# Altium PCB Hameg.PcbDoc
Units mil, origin at the board's own origin, x right, y up, seen from the top; angles counter-clockwise.
Board outline 3446.85 x 7668.31 mil, 2 copper layers (Top Layer, Bottom Layer); 126 components, 67 nets, 330 pads, 60 vias.
Unrouted connection lines stored in the file: 1.
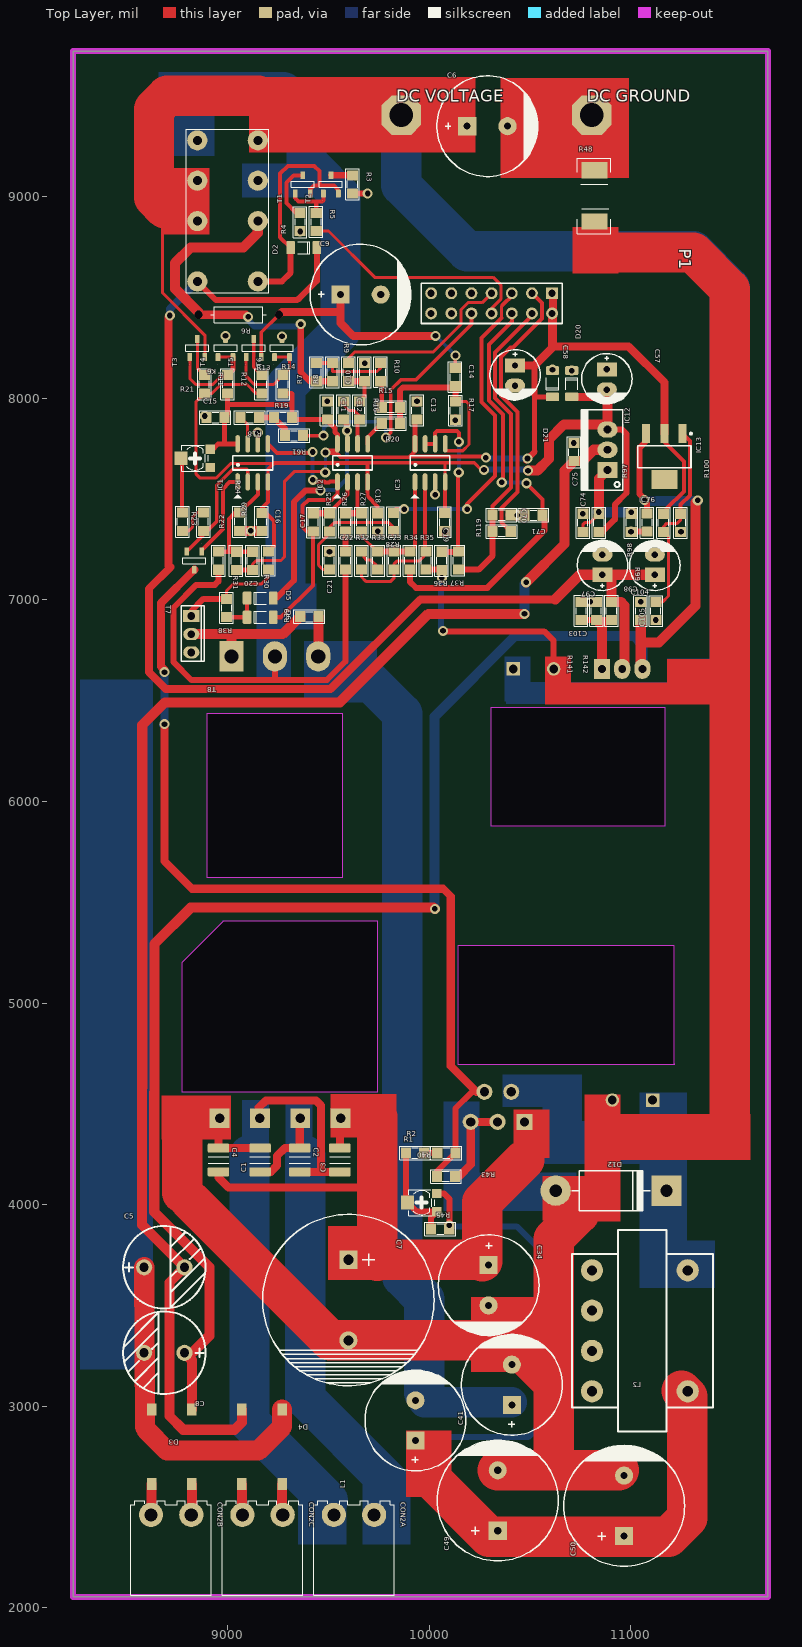
[diagram p0: Top Layer view]
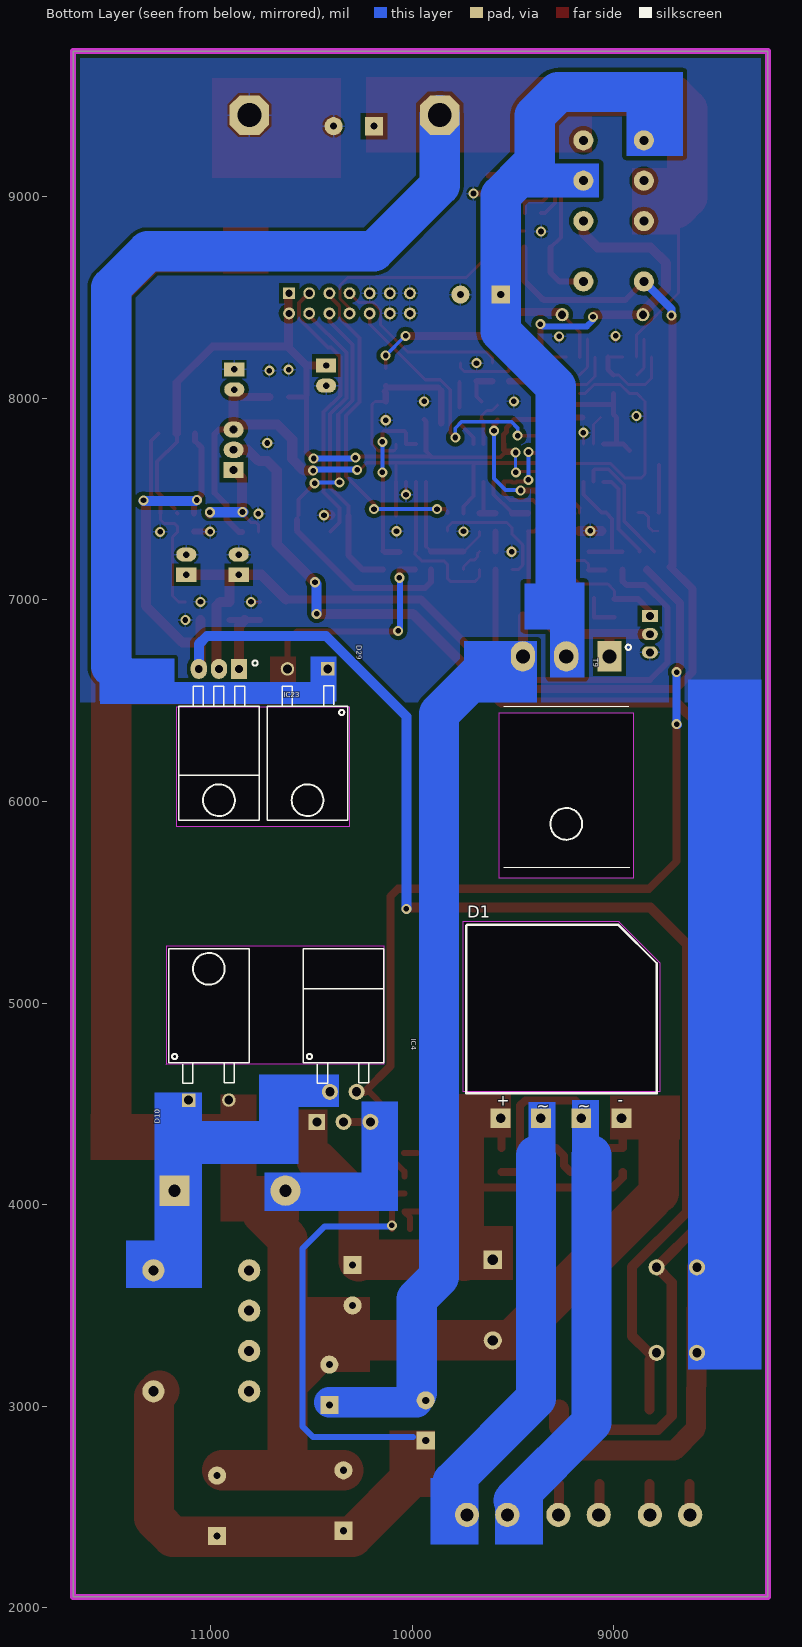
[diagram p1: Bottom Layer view, seen from below]

## Layer stack, top to bottom
Top Layer: signal copper 1.4
Dielectric: dielectric 12.6, FR-4, Dk 4.8
Bottom Layer: signal copper 1.4

## Board outline
8234.25,2054.13 11681.1,2054.13 11681.1,9722.44 8234.25,9722.44
cut-out: 10308.07,6466.54 11170.28,6466.54 11170.28,5877.95 10308.07,5877.95
cut-out: 10141.24,4695.87 11219,4695.87 11216.04,4698.82 11216.04,5284.45 10141.24,5284.45
cut-out: 8899.11,6437.99 8916.83,6437.01 9569.39,6437.01 9569.39,5621.06 8899.9,5621.06
cut-out: 8771.65,4559.06 9746.06,4559.06 9746.06,5406.5 8975.39,5406.5 8975.39,5403.54 8771.65,5199.8

## Design rules (kind name [scope] priority, off if disabled: settings)
Clearance Impoly [All vs (Inpoly)] p1: gap=20
Clearance [All] p2: gap=10
ComponentClearance [All] p1 off: gap=10 collisioncheckmode=3 verticalgap=10 showdistances=FALSE
PolygonConnect [All] p1: connectstyle=Relief reliefconductorwidth=10 reliefentries=4 polygonreliefangle="90 Angle" airgapwidth=10
RoomDefinition U_Preregulation [InComponentClass('U_Preregulation')] p1 off: confinementstyle=ConfineIn formatcopy=TRUE lockcomponents=FALSE outline 8475,1990 11480,1990 11480,9470 8475,9470
RoomDefinition U_Endregulation [InComponentClass('U_Endregulation')] p2 off: confinementstyle=ConfineIn formatcopy=TRUE lockcomponents=FALSE outline 8475,2005.43 11495,2005.43 11495,9475 8475,9475
RoutingVias [All] p1: holewidth=28 width=50 viastyle="Through Hole" minholewidth=28 minwidth=50 maxholewidth=28 maxwidth=50
SilkToSolderMaskClearance SilkscreenOverComponentPads [IsPad] p1: minsilkscreentomaskgap=10 clearancetoexposedcopper=TRUE
SolderMaskExpansion [All] p1: expansion=4
Width [All] p1: maxlimit=500 minlimit=10 preferedwidth=100
26 further rules are at their usual default settings.

## Classes and differential pairs
component class U_Preregulation: C1 C1_U_Preregulation2 C2 C2_U_Preregulation2 C3 C3_U_Preregulation2 C4 C4_U_Preregulation2 C5_U_Preregulation2 C7 C7_U_Preregulation2 C8 C8_U_Preregulation2 C20 C20_U_Preregulation2 C34 C34_U_Preregulation2 C41 C41_U_Preregulation2 C49 C49_U_Preregulation2 C50 C50_U_Preregulation2 C57 C57_U_Preregulation2 C58 C58_U_Preregulation2 C74 C74_U_Preregulation2 C75 C75_U_Preregulation2 C76 C76_U_Preregulation2 C97 C97_U_Preregulation2 C98 C98_U_Preregulation2 C103 C103_U_Preregulation2 C104 C104_U_Preregulation2 C105 C105_U_Preregulation2 CON2A CON2A_U_Preregulation2 CON2B CON2B_U_Preregulation2 CON2C CON2C_U_Preregulation2 D1 D3 D3_U_Preregulation2 D4 D4_U_Preregulation2 D10 D12 D20 D21 IC1 IC4 IC12 IC13 IC23 L1 L1_U_Preregulation2 L2 L2_U_Preregulation2 R1 R2 R2_U_Preregulation2 R21 R21_U_Preregulation2 R22 R23 R24 R29 R31 R40 R43 R45 R97 R98 R99 R100 R141 R142 T7
component class U_Endregulation: C6 C9 C10 C11 C12 C13 C14 C15 C16 C17 C18 C19 C21 C22 C23 C70 C71 D2 D5 D6 D29 "DC GROUND" "DC VOLTAGE" IC2 IC3 K6 P1 R3 R4 R5 R6 R7 R8 R9 R10 R11 R12 R13 R14 R15 R16 R17 R18 R19 R20 R25 R26 R27 R28 R30 R32 R33 R34 R35 R36 R37 R38 R39 R48 R61 R119 T1 T2 T3 T4 T5 T6 T8 T9

## Components (designator, comment, footprint, x,y, rotation, side; value= is the part's Value field where it differs from the comment)
C1 "1n/250V" CAPC3225X220N 9161.42,4221.46 r90 top
C2 "1n/250V" CAPC3225X220N 9358.27,4221.46 r270 top
C3 "1n/250V" CAPC3225X220N 9557.09,4221.46 r90 top
C4 "1n/250V" CAPC3225X220N 8954.72,4221.46 r270 top
C5 "330uF/16V" CAP40x20 8586.42,3688.98 r0 top
C6 "100uF/63V" CP2/5 10188.98,9350.39 r0 top
C7 "2200uF/63V" CP4/8.5 9599.41,3726.38 r270 top
C8 "1000uF/16V" CAP40x20 8786.42,3264.76 r180 top
C9 "100uF/63V" CP2/5 9560,8515 r0 top
C10 "4u7" SM-0805 9680,8130 r90 top
C11 "100n" SM-0805 9495,7940 r270 top
C12 "100p" SM-0805 9575,7940 r270 top
C13 "100n" SM-0805 9940,7940 r270 top
C14 "1n" SM-0805 10129.92,8105.31 r270 top
C15 "100n" SM-0805 8940,7905 r0 top
C16 "100n" SM-0805 9170,7386.8 r270 top
C17 "1n" SM-0805 9425,7385 r90 top
C18 "100n" SM-0805 9745,7385 r270 top
C19 "100n" SM-0805 10077.76,7385.83 r270 top
C20 "100n" SM-0805 9123.54,7194.02 r270 top
C21 "4u7" SM-0805 9505,7195 r90 top
C22 "100n" SM-0805 9585,7195 r90 top
C23 "100p" SM-0805 9825,7195 r90 top
C34 "100uF/63V" CP2/5 10295.28,3699.8 r270 top
C41 "100uF/63V" CP2/5 10410.43,3005.91 r90 top
C49 "470uF/63V" CP3/7 10340.55,2381.89 r90 top
C50 "470uF/63V" CP3/7 10967.52,2355.32 r90 top
C57 "100uF/10V" CP1/2.5 10881.89,8143.7 r270 top
C58 "100uF/10V" CP1/2.5 10426.18,8163.17 r270 top
C70 "4u7" SM-0805 10360,7421.28 r0 top
C71 "4u7" SM-0805 10517.72,7420.28 r180 top
C74 "100n" SM-0805 10762.99,7382.72 r90 top
C75 "100n" SM-0805 10718.5,7733.27 r90 top
C76 "100n" SM-0805 11081.69,7383.86 r90 top
C97 "100uF/10V" CP1/2.5 10860,7125 r90 top
C98 "100uF/10V" CP1/2.5 11120,7125 r90 top
C103 "100n" SM-0805 10755,6945.43 r270 top
C104 "100n" SM-0805 11050,6945.43 r270 top
C105 "100n" SM-0805 11125,6945.43 r90 top
CON2A "SUPPLY" JACK2_NAM 9727.36,2460.63 r270 top
CON2B "SUPPLY" JACK2_NAM 8820.04,2460.63 r270 top
CON2C "SUPPLY" JACK2_NAM 9273.7,2460.63 r270 top
D1 "Bridge2" "DIODE BRIDGE(FLAT) BIG" 9260.83,4402.56 r180 bottom
D2 "1N4150" "SOD80, LL-34" 9377.99,8747.72 r180 top
D3 "Bridge 1A SMD" SDIP 8822.83,2983.27 r270 top
D4 "Bridge 1A SMD" SDIP 9270.67,2983.27 r270 top
D5 "1N4150" "SOD80, LL-34" 9161.97,7009.09 r0 top
D6 "1N4150" "SOD80, LL-34" 9161.97,6914.09 r0 top
D10 "NP" TO-220AC 11008.86,4518.68 r0 bottom
D12 "SB5100" D5A 11178.15,4068.9 r180 top
D20 "1N4150" "SOD80, LL-34" 10612.2,8072.83 r90 top
D21 "1N4150" "SOD80, LL-34" 10707.68,8072.83 r270 top
D29 "MBR20100" TO-220AC 10517.99,6657.72 r180 bottom
"DC GROUND" "Testpoint" TP 10807.09,9405.51 r90 top
"DC VOLTAGE" "Testpoint" TP 9862.2,9405.51 r90 top
IC1 "LM358AM" SO-8 9125,7680 r90 top
IC2 "LTC6081" SO-8 9620,7680 r90 top
IC3 "LTC6081" SO-8 10005,7680 r90 top
IC4 "LM2576HVT - ADJ" LM2576 10340.55,4577.76 r180 bottom
IC12 "LM337" QTO-220 10885,7645 r90 top
IC13 "LM317" MP04A_N 11167.32,7710.63 r270 top
IC23 "LM317" QTO-220N 10857.99,6657.72 r180 bottom
K6 "Relay-DPDT" Relay5V 8850,8880 r180 top
L1 "270uH/2A" CP2/5 9932.09,2828.74 r90 top
L2 "270uH/2A" TRANS6C 10808.07,3073.82 r0 top
P1 "Header 7X2" HDR2X7 10610.24,8521.65 r0 top
R1 "49K9" SM-0805 9930.24,4256.02 r0 top
R2 "1K" "POT SMD 3MM" 9963.27,4009.61 r90 top
R3 "0R00" SM-0805 9620,9061.65 r270 top
R4 "NP" SM-0805 9360,8875 r90 top
R5 "1K00" SM-0805 9440,8875 r270 top
R6 "1R00" RESTH_AXIAL-0.4 9055,8415 r180 top
R7 "4K99" SM-0805 9440,8130 r90 top
R8 "NP" SM-0805 9520,8130 r90 top
R9 "10K0" SM-0805 9600,8130 r270 top
R10 "4K99" SM-0805 9760,8130 r270 top
R11 "2K00" SM-0805 8885,8070 r270 top
R12 "2K00" SM-0805 9000,8070 r270 top
R13 "2K00" SM-0805 9170,8070 r270 top
R14 "2K00" SM-0805 9275,8070 r270 top
R15 "4K99" SM-0805 9810,7955 r0 top
R16 "10K0" SM-0805 9655,7940 r270 top
R17 "2K00" SM-0805 10130.51,7939.02 r270 top
R18 "10K0" SM-0805 9110,7905 r180 top
R19 "10K0" SM-0805 9275,7905 r0 top
R20 "10K0" SM-0805 9810,7875 r180 top
R21 "100R" "POT SMD 3MM" 8838.58,7702.76 r90 top
R22 "2K20" SM-0805 8880,7387.8 r90 top
R23 "1K5" SM-0805 8776.57,7387.8 r90 top
R24 "4K42" SM-0805 9060,7387.8 r90 top
R25 "10K0" SM-0805 9505,7385 r90 top
R26 "10K0" SM-0805 9585,7385 r90 top
R27 "10K0" SM-0805 9665,7385 r90 top
R28 "10K0" SM-0805 9823.82,7385.83 r270 top
R29 "39K2" SM-0805 8954.72,7194.88 r90 top
R30 "1K00" SM-0805 9202.76,7194.88 r270 top
R31 "10K0" SM-0805 9043.54,7194.02 r270 top
R32 "976R" SM-0805 9665,7195 r90 top
R33 "0R00" SM-0805 9745,7195 r90 top
R34 "10K0" SM-0805 9905,7195 r90 top
R35 "20R0" SM-0805 9985,7195 r90 top
R36 "2k94" SM-0805 10062.99,7193.9 r270 top
R37 "1k00" SM-0805 10145,7195 r270 top
R38 "499R" SM-0805 8995,6960 r270 top
R39 "4K99" SM-0805 9405.51,6917.32 r180 top
R40 "0" SM-0805 10085.24,4256.02 r0 top
R43 "1K00" SM-0805 10083.27,4139.61 r180 top
R45 "NP" SM-0805 10055.12,3878.94 r180 top
R48 "0R05" 2512 10820.87,8876.97 r90 top
R61 "10K0" SM-0805 9329.72,7814.96 r180 top
R97 "249R" SM-0805 10842.99,7382.72 r90 top
R98 "665R" SM-0805 11002.99,7382.72 r270 top
R99 "249R" SM-0805 11162.99,7382.72 r270 top
R100 "1K00" SM-0805 11247.99,7382.72 r90 top
R119 "1M00" SM-0805 10360,7340 r180 top
R141 "665R" SM-0805 10830,6945.43 r270 top
R142 "249R" SM-0805 10905,6945.43 r270 top
T1 "NP" SOT23-3 9372.91,9061.65 r90 top
T2 "BC817" SOT23-3 9512.91,9061.65 r90 top
T3 "BC846B" SOT23-3 8850,8250 r90 top
T4 "BC846B" SOT23-3 8990,8250 r90 top
T5 "BC846B" SOT23-3 9130,8250 r90 top
T6 "BC846B" SOT23-3 9270,8250 r90 top
T7 "BC856B" SOT23-3 8835,7195 r270 top
T8 "BD237" TO-126 8820,6920 r270 top
T9 "TIP147" TO-247 9235,6720 r0 bottom

## Footprints (in the part's own frame and the unit in brackets; to place one, negate y for a bottom-side part, rotate by r counter-clockwise, add the part's x,y. Pads: shape width x height; smd on the part's side, far side on the other; paste and mask are expansions set on the pad)
2512 [mil]
  rect 80x130 smd: 1(0,0) 2(255,0)
  silkscreen extent -60,-80 315,85
CAP40x20 [mil]
  round 80 hole 45: 1(0,0) 2(200,0)
  silkscreen extent -105,-205 305,205, body extent -97,-197 296,197, height 788
CAPC3225X220N [mm] "Chip Capacitor, Body 3.2x2.5mm, EIA 1210, IPC Medium Density"
  round 0.508 on Mech15: 0(0,0)
  rrect25% 1.15x2.7 smd: 1(-1.5,0) 2(1.5,0)
  silkscreen extent -0.4,-1.3 0.4,1.3, body extent -1.8,-1.4 1.8,1.4, height 2.19
CP1/2.5 [mil] "Tu hoa 33 >100 uF,50V, 220uF/16V,25V"
  rect 70x100 hole 32: 1(0,0)
  oval 70x100 hole 32: 2(100,0)
  silkscreen extent -78,-125 172,125, body extent -76,-124 172,124, height 422
CP2/5 [mil] "Tu hoa 1000uF/25V,50V"
  rect 90x90 hole 35: 1(0,0)
  round 90 hole 35: 2(200,0)
  silkscreen extent -150,-250 350,250, body extent -145,-244 347,248, height 740
CP3/7 [mil] "Tu hoa 4700uF/25V"
  rect 90x90 hole 35: 1(0,0)
  round 90 hole 35: 2(300,0)
  silkscreen extent -150,-300 450,300
CP4/8.5 [mil] "Tu hoa 4700uF/50V"
  rect 90x90 hole 50: 1(0,0)
  round 90 hole 50: 2(400,0)
  silkscreen extent -225,-425 625,425, body extent -236,-438 630,428, height 984
D5A [mil] "Diode 5A, W 200mil, L 550mil"
  round 150 hole 60: 1(550,0)
  rect 150x150 hole 60: 2(0,0)
  silkscreen extent 80,-100 470,100, body extent -52,-106 590,103, height 254
"DIODE BRIDGE(FLAT) BIG" [mil]
  rect 98.43x98.43 hole 47.24: 1(-300,26) 2(-100,26) 3(100,26) 4(300,26)
  silkscreen extent -470,150 475,985, body extent -463,150 463,989, height 224
HDR2X7 [mm] "Connector; Header; 7x2 Position"
  rect 1.5x1.5 hole 0.9: 1(0,0)
  round 1.5 hole 0.9: 2(0,-2.54) 3(-2.54,0) 4(-2.54,-2.54) 5(-5.08,0) 6(-5.08,-2.54) 7(-7.62,0) 8(-7.62,-2.54) 9(-10.16,0) 10(-10.16,-2.54) 11(-12.7,0) 12(-12.7,-2.54) 13(-15.24,0) 14(-15.24,-2.54)
  silkscreen extent -16.51,-3.81 1.27,1.27, body extent -16.5,-3.82 1.26,1.28, height 8.52
JACK2_NAM [mil]
  round 120 hole 65: 1(0,0) 2(0,-200)
  silkscreen extent -70,-300 400,100, body extent -73,-300 400,100, height 339
LM2576 [mil]
  rect 80x80 hole 45: 1(-132,-167.09)
  round 80 hole 45: 2(-67,-18) 3(1,-167) 4(66,-18) 5(134,-167)
  silkscreen extent -199,24 200,691, body extent -204,-183 205,692, height 185
MP04A_N [mm] "SOT223, 4-Leads, Body 6.5x3.5mm, Pitch 2.3mm, Lead Span 7mm, IPC Medium Density"
  rect 2.4x1 smd: 1(-2.9,2.3) 2(-2.9,0) 3(-2.9,-2.3)
  rect 2.4x3.3 smd: 4(2.9,0)
  silkscreen extent -3.02,-3.35 1.4,3.48, body extent -1.85,-3.35 1.85,3.35, height 1.8
"POT SMD 3MM" [mil]
  rect 45x47 smd: 1(-45,-75) 3(45,-75)
  rect 69x63 smd: 2(0,70)
  silkscreen extent -65,-65 65,65, body extent -75,-88 75,89, height 40
QTO-220 [mil] "TO-220 - 1-2-3"
  rect 80x100 hole 39: 1(0,0)
  oval 80x100 hole 39: 2(100,0) 3(200,0)
  silkscreen extent -100,-76 300,130, body extent -119,-64 322,121, height 755
QTO-220N [mil] "TO-220 - 1-2-3"
  rect 80x100 hole 39: 1(0,0)
  oval 80x100 hole 39: 2(-100,0) 3(-200,0)
  silkscreen extent -300,-750 99,42, body extent -300,-752 100,7, height 180
Relay5V [mil]
  round 100 hole 45: 1(0,0) 2(0,-200) 3(0,-400) 4(-300,0) 5(-300,-200) 6(-300,-400) 7(0,300) 8(-300,300)
  silkscreen extent -355,-455 55,355, body extent -343,-459 43,359, height 484
RESTH_AXIAL-0.4 [mil]
  round 0 / inner round 0 / far side round 65 hole 40 unplated: 1(-200,0) 2(200,0)
  silkscreen extent -138,-40 138,40, body extent -212,-50 212,50, height 102
SDIP [mm] "SDIP diode"
  rect 1.52x1.2 smd: 1(0,0) 2(9.398,0) 3(9.398,-5.08) 4(0,-5.08)
  body extent -0.38,-6.79 9.62,1.71, height 3.63
SM-0805 [mil] "Compoment SMD 80x50mil"
  rect 50x55 smd: 1(-45,0) 2(45,0)
  silkscreen extent -77,-34 76,33, body extent -40,-27 40,23, height 24
SO-8 [mm] "8-Pin Small Outline Integrated Circuit 1.27 mm Pitch, IPC Medium Density"
  oval 2.2x0.6 smd: 1(-2.4,1.905) 2(-2.4,0.635) 3(-2.4,-0.635) 4(-2.4,-1.905) 5(2.4,-1.905) 6(2.4,-0.635) 7(2.4,0.635) 8(2.4,1.905)
  silkscreen extent -4.44,-2.5 0.9,2.5, body extent -2.89,-2.43 3.15,2.59, height 1.6
"SOD80, LL-34" [mm] "Diode, MiniMELF"
  round 0.5 on Mech15: 0(0,0)
  rrect25% 1.1x1.65 smd: A(1.65,0) K(-1.65,0)
  silkscreen extent -0.76,-0.76 0.76,0.76, body extent -1.8,-0.75 1.8,0.75, height 1.47
SOT23-3 [mm] "SOT23, 3 pin"
  round 0.5 on Mech15: 0(0,0)
  rrect25% 1x0.6 smd: 1(-1.15,0.95) 2(-1.15,-0.95) 3(1.15,0)
  silkscreen extent -0.38,-1.45 0.38,1.45, body extent -1.4,-1.45 1.4,1.45, height 1.29
TO-126 [mil] "TO-126 - 1-2-3"
  rect 60x80 hole 39: 1(0,0)
  oval 60x80 hole 39: 2(90,0) 3(180,0)
  silkscreen extent -50,-50 225,65
TO-220AC [mm] "TO, Thru-Hole, Vertical, Heatsink Mounted; 3 In-Line Leads (1 Absent); Pitch 2.54 mm"
  rect 1.7x1.7 hole 1.1: 1(2.54,0)
  round 1.7 hole 1.1: 3(-2.54,0)
  silkscreen extent -5.08,-19.05 5.05,-2.11, body extent -5.08,-19.09 5.08,0.19, height 4.45
TO-247 [mil] "TO-247 - 1-2-3"
  rect 120x150 hole 70: 1(-215,0)
  oval 120x150 hole 70: 2(0,0) 3(215,0)
  silkscreen extent -321,-58 310,1050, body extent -313,-15 313,1047, height 232
TP [mm] "VIT"
  oct 5x5 hole 3: 1(0,0)
TRANS6C [mil]
  round 110 hole 50: 1(0,0) 1(0,200) 3(0,400) 3(0,600) 5(475,600) 6(475,0)
  silkscreen extent -100,-200 600,800, body extent -100,-200 600,800, height 787

## Part data
C1 C2 C3 C4 C10 C11 C12 C13 C14 C15 C16 C17 C18 C19 C20 C21 C22 C23 C70 C71 C74 C75 C76 C103 C104 C105: library part CAP, "Capacitor"
C5 C6 C7 C8 C9 C34 C41 C49 C50 C57 C58 C97 C98: library part "CAPACITOR POL", "Capacitor"
CON2A CON2B CON2C: library part CON2, "Connector"
D1: "Diode Bridge"
D2 D5 D6 D20 D21: library part "Diode 1N4007", "1 Amp General Purpose Rectifier"
D3 D4: library part "Diode Bridge Flate", "Diode Bridge"
D10 D12 D29: library part "D Schottky", "Schottky Diode"
IC1: "Low Power Dual Operational Amplifier, 8-pin Narrow SOIC"
IC2 IC3: library part LM358AM, "Low Power Dual Operational Amplifier, 8-pin Narrow SOIC"
IC4: library part LM2576, "LM2576 - ADJ"
IC12: "On ap (-)     -1.2 -> - 37V"
IC13 IC23: "Adj Voltage +1.2 -> +37V"
K6: "Dual-Pole Dual-Throw Relay"
L1 L2: library part INDUCTOR
P1: "Header, 7-Pin, Dual row"
R1 R3 R4 R5 R6 R7 R8 R9 R10 R11 R12 R13 R14 R15 R16 R17 R18 R19 R20 R22 R23 R24 R25 R26 R27 R28 R29 R30 R31 R32 R33 R34 R35 R36 R37 R38 R39 R40 R43 R61 R97 R98 R99 R100 R119 R141 R142: library part RES2, "tme.vn"
R2 R21: library part RPot, "Potentiometer"
R45: library part RES2
R48: library part "Res Semi", "Semiconductor Resistor"
T1 T2 T3 T4 T5 T6 T8: library part TIP41C, "NPN 2W, BCE BD139"
T7: library part PNP1, "Công ty C? ph?n TQCOM"
T9: library part TIP42C, "PNP 2W, BCE Hoang Phat"

## Via types
v1: diameter 50, hole 28, Top Layer to Bottom Layer, 60 vias

## Nets (pads, with @x,y where several pads share a name; then routed paths per layer and width w, separated by ;. In a path a pad name is that pad's centre, name@x,y a point inside that pad or via, vN(x,y) a via of type N, cw(c..) or ccw(c..) an arc to the next point about the centre after c; other vN are vias at no path point)
4,6V: C97.1 C98.1 D2.K IC23.2 K6.7 R142.1 | length 6190.6
  Top Layer w25: C97.1@10897.64,7125 C97.1@10905,7117.64
  Top Layer w30: K6.7 8941.81,8488.19 9344.83,8488.19 9350.45,8493.82 9354.06,8493.82 9442.95,8582.71 D2.K
  Top Layer w40: v1(8713.58,8411.42) 8707.08,8404.92 8707.08,7171.85 8716.54,7162.4 8609.25,7055.12 8609.25,6641.71 8693.36,6557.6 9511,6557.6 9956.36,7002.95 10625.98,7002.95
  Top Layer w50: 10625.98,7002.95 10748.03,7125 C97.1 10897.64,7125 C98.1 ; C97.1@10905,7117.64 R142.1 10951.5,6990.43 10969.49,6972.44 10969.49,6669.22 IC23.2
  Bottom Layer w40: v1(8713.58,8411.42) 8713.58,8443.58 K6.7
6,4V: C11.2 C13.2 C15.2 C20.2 C58.1 D20.K IC1.8 IC2.8 IC3.8 IC13.2 P1.1 P1.2 R12.2 R14.2 R19.2 R21.3 R31.2 R99.1 | length 6106.5
  Top Layer w15: C20.2 9123.54,7176.69 9142.72,7195.87 9264.76,7195.87 9281.5,7212.6 9281.5,7586.61 9332.85,7637.97 9473.1,7637.97 9483.12,7627.95 9484.25,7627.95 9484.71,7628.42 v1(9484.71,7633.25)
  Top Layer w18: 9560.45,7708.25 9907.07,7708.25 ; 9910.43,7711.61 v1@10275.59,7711.61
  Top Layer w20: v1(9486.3,7731.22) 9496.22,7741.14 9527.56,7741.14 9560.45,7708.25 ; 9906.99,7715.06 IC3.8@9930,7738.07 ; v1@10275.59,7711.61 v1(10281.5,7705.71) ; v1@10479.82,7692.42 10479.82,7710.14 v1(10488.19,7701.77) ; R99.1 R99.1@11167.32,7432.05 ; IC13.2 11167.32,7783.46 11264.29,7686.5 11264.29,7538.9 11178.15,7452.76
  Top Layer w25: R21.3@8920,7740.87 8953.62,7774.49 8983.27,7774.49 ; R12.2 9000,7968.5 ; R31.2 C20.2 ; IC1.8 8983.27,7774.49 ; R14.2 9316.54,8025 9320,8021.54 9320,7970.47 ; v1(9486.3,7731.22) 9531.42,7731.22 9545,7744.8 IC2.8 ; IC2.8@9546.26,7775.75 9546.26,7819.64 9532.48,7833.42 9532.48,7853.2 9495,7890.68 C11.2 9330,7895 R19.2 9320,7970.47 ; IC3.8@9930,7738.07 IC3.8 9930,7885 C13.2 ; 10523.62,7736.22 10523.62,8000 ; 10523.62,8016.73 10523.62,8000 ; D20.K 10531.5,8007.87 10523.62,8000 ; 8983.27,7774.49 8985,7776.22 C15.2 9000,7920 9000,7968.5 ; 9000,7968.5 9318.03,7968.5 9320,7970.47
  Top Layer w30: v1@10479.82,7692.42 10523.62,7736.22 ; 10523.62,8016.73 10523.62,8163.17
  Top Layer w40: C58.1 10523.62,8163.17 10610.24,8249.78 P1.2 ; P1.1@10614.17,8509.84 10614.17,8257.87 10989.17,8257.87 11167.32,8079.72 IC13.2
  Bottom Layer w15: v1(9484.71,7633.25) 9484.71,7628.42 9484.25,7627.95 9483.12,7627.95 9477.82,7633.25 9486.3,7641.72 v1(9486.3,7731.22)
  Bottom Layer w20: v1(10281.5,7705.71) 10287.4,7705.71 v1@10291.34,7701.77
  Bottom Layer w30: v1@10291.34,7701.77 v1(10488.19,7701.77)
11V: C8.1 C76.2 C104.2 D3.1 IC13.3 IC23.3 | length 8049.3
  Top Layer w30: v1@11070.37,7498.52 11044.29,7524.61 11044.29,7755.91 11076.77,7788.39 IC13.3 ; C76.2 v1@11081.69,7487.2
  Top Layer w50: C8.1 8822.83,3228.35 D3.1 ; C8.1@8799.21,3264.76 8824.8,3264.76 8909.45,3349.41 8909.45,3689.96 8636.26,3963.15 8636.26,4554.85 8636.77,4555.36 8636.77,5293.06 8817.14,5473.43 10022.64,5473.43 v1(10028.54,5467.52) ; C104.2 11050,6788.39 ; IC23.3 11050,6665.71 11050,6788.39 ; v1@11328.74,7490.16 11320.87,7482.28 11320.87,6969.49 11139.76,6788.39 11050,6788.39
  Bottom Layer w50: v1@10027.56,5467.52 10027.56,6421.74 10426.68,6820.87 11017.72,6820.87 11057.99,6780.59 IC23.3 ; v1(11067.91,7496.06) 11073.82,7490.16 v1@11332.68,7490.16
  other v1: 11332.68,7494.09
-4,7V: C16.1 C18.1 C19.1 C57.2 D21.A IC1.4 IC2.4 IC3.4 IC12.3 R11.2 R13.2 R30.1 R97.1 | length 5041.9
  Top Layer w15: C16.1 C16.1@9170,7455.43 ; R13.2 9140.35,8025 9096.46,8068.9 8966.54,8068.9 8922.64,8025 R11.2 8844.31,7984.31 8844.31,7624.02 8864,7604.33 8942.41,7604.33 9014.32,7676.24 9227.42,7676.24 9200,7648.82 IC1.4 ; IC3.4 10080,7676.89 ; 10223.43,7680.12 10258.49,7645.06 v1(10272.15,7645.06)
  Top Layer w18: 9696.87,7680.12 10223.43,7680.12
  Top Layer w20: C16.1@9170,7455.43 9200,7485.43 IC1.4 ; C16.1@9194.09,7428.94 9231.3,7391.73 9231.3,7268.43 R30.1 ; 9230.37,7676.24 9232.38,7678.25 9695,7678.25 ; 9695,7667.42 IC2.4 9695,7514.65 9745,7464.65 C18.1 ; C19.1@10080,7419.29 IC3.4
  Top Layer w30: R97.1 10859.37,7337.72 10921.26,7399.61 10921.26,7472.44 10979.33,7530.51 10979.33,7823.82 10958.15,7845 IC12.3 IC12.3@10859.92,7870.08
  Top Layer w40: D21.A 10846.06,8007.87 C57.2
  Top Layer w50: v1(10490.67,7641.12) 10536.79,7641.12 10594.49,7698.82 10594.49,7796.26 10668.31,7870.08 IC12.3@10859.92,7870.08 ; C57.2 10885,8040.59 IC12.3
  Bottom Layer w15: v1(10272.15,7645.06) v1@10274.73,7647.64 ; v1@10489.17,7647.64 10490.67,7646.14 v1(10490.67,7641.12)
  Bottom Layer w30: v1@10274.73,7647.64 v1@10489.17,7647.64
GND: "DC GROUND.1" C5.1 C6.2 C8.2 C9.2 C10.2 C11.1 C13.1 C15.1 C16.2 C18.2 C19.2 C21.2 C57.1 C58.2 C70.2 C71.2 C74.2 C75.2 C76.1 C97.2 C98.2 C103.1 C104.1 C105.1 D3.4 D4.1 D20.A D21.K IC1.6 IC3.3 P1.9 P1.11 P1.12 P1.13 P1.14 R3.2 R4.1 R17.2 R24.1 R48.2 R98.2 R100.1 R141.1 T4.3 T6.3 T8.3 | length 2152.8
  Top Layer w15: IC1.6 v1(9150,7830.12)
  Top Layer w20: v1(10030,7522.13) IC3.3 ; C103.1 v1(10798.94,6990.43) ; v1(10762.24,7427.72) C74.2 ; v1(11049.92,6990.43) C104.1 ; R100.1 v1(11249.88,7337.72)
  Top Layer w30: T4.3 v1(8990,8310.2) ; T6.3 9270,8309.72 9270.14,8309.59 v1(9270.14,8307.49) ; v1(9360,8827.99) R4.1 ; R3.2 9694.89,9016.65 v1(9695.35,9016.19) ; D20.A v1(10612.2,8142.72) ; R98.2 11004.13,7338.86 C76.1
  Top Layer w50: R24.1 v1(9115.87,7342.8) 9169,7342.8 C16.2 ; C21.2 v1(9505.83,7239.17) ; C10.2 v1(9680.12,8175.12) ; C13.1 v1(9940,7985.28) ; v1(10077.05,7340.83) C19.2 ; v1(10130.51,7891.34) R17.2 ; C70.2 10438.01,7421.28 v1(10437.01,7420.28)
  Top Layer w100: C5.1 8590.55,2896.65 ; 8597.44,2881.89 8699.8,2779.53 9151.57,2779.53 9270.67,2898.62 D4.1
  Bottom Layer w30: v1@9693.9,9017.65 v1(9695.35,9016.19)
  other v1: 11125,6900.43 11001.97,7338.74 9745,7340 10718.5,7778.27 8886.81,7912.4 9495,7985 10707.68,8137.8
IADC: C71.1 P1.6 R34.1 | length 2144.2
  Top Layer w20: v1(10360.24,7583.66) 10366.14,7589.57 10366.14,7919.39 10296.18,7989.36 10296.18,8266.65 10410.24,8380.71 P1.6 ; v1(10483.27,7578.74) 10562.72,7499.29 C71.1
  Top Layer w30: R34.1 9905,7090.04 9934.8,7060.24 10288.58,7060.24 10571.85,7343.5 C71.1@10571.85,7398.15
  Bottom Layer w20: v1(10360.24,7583.66) 10478.35,7583.66 v1(10483.27,7578.74)
ISOLL: P1.5 R28.1 | length 1590.9
  Top Layer w15: 10359.25,8397.64 10359.25,8457.68
  Top Layer w20: R28.1 9823.82,7438.98 9835.63,7450.79 v1(9875.98,7450.79) v1@9875.98,7455.71 ; v1(10188.98,7450.79) 10188.98,7476.04 10327.76,7614.82 10327.76,7915.35 10260.33,7982.78 10260.33,8298.72 10359.25,8397.64 ; 10364.17,8462.6 P1.5@10415.16,8513.58
  Bottom Layer w20: v1(9875.98,7450.79) 10179.13,7450.79 10182.09,7453.74 10186.02,7453.74 v1(10188.98,7450.79)
NetC1_1: C1.1 C2.1 CON2A.1 D1.2 | length 2215.9
  Top Layer w40: C1.1 9214.57,4162.4 9246.06,4193.9 9246.06,4242.13 9284.45,4280.51 C2.1 D1.2@9358.27,4433.09
  Bottom Layer w200: 9384.84,4243.11 9384.84,3038.39 9798.23,2625
NetC2_2: C2.2 C3.1 CON2A.2 D1.3 | length 2780.5
  Top Layer w40: D1.3@9154.92,4436.43 9154.92,4481.69 9189.96,4516.73 9437.99,4516.73 9463.58,4491.14 9463.58,4162.4 ; C2.2 9463.58,4162.4 ; C3.1 9463.58,4162.4
  Bottom Layer w200: 9109.25,4245.08 9109.25,2919.29 9496.85,2531.69
NetC3_2: C3.2 C4.2 C7.1 C34.1 D1.1 IC4.1 | length 3140.9
  Top Layer w40: C4.2 8954.72,4134.84 9004.92,4084.65 9728.35,4084.65 ; C3.2 D1.1@9557.09,4434.27
  Top Layer w100: C7.1@9596.46,3714.57 C7.1@9599.41,3714.57 ; 10472.55,4221.57 IC4.1
  Top Layer w200: C7.1 9742.13,3726.38 ; 9742.13,3720.47 9742.13,3726.38 ; 9742.13,4436.43 9742.13,3726.38 ; 10472.55,4221.57 10263.78,4012.8 10263.78,3718.5 10255.91,3726.38 9742.13,3726.38
NetC5_2: C5.2 C75.1 D4.4 IC12.2 | length 7187
  Top Layer w50: D4.4 9070.67,2919.09 9034.45,2882.87 8779.53,2882.87 8711.42,2950.98 8711.42,3613.98 C5.2 8576.26,3899.13 8576.26,4579.7 8576.77,4580.22 8576.77,6378.94 8689.96,6492.13 9557.09,6492.13 9996.06,6931.1 v1(10473.43,6931.1) ; v1(10481.3,7087.6) 10671.26,7277.56 10671.26,7641.02 C75.1 10760.12,7688.27 10816.85,7745 IC12.2
  Bottom Layer w50: v1(10473.43,6931.1) 10473.43,7079.72 v1(10481.3,7087.6)
NetC10_1: C10.1 R9.2 R16.1 | length 191.1
  Top Layer w20: R16.1 9656.26,7985 9680,8008.74 C10.1
  Top Layer w30: R9.2 C10.1
NetC12_1: C12.1 IC2.6 R16.2 | length 245.7
  Top Layer w15: C12.1@9575,7967.32 9602.32,7940 9628.9,7940 9655,7913.9 R16.2
  Top Layer w20: IC2.6 9645,7885 R16.2
NetC12_2: C12.2 D5.A IC2.7 | length 1192.6
  Top Layer w20: C12.2 C12.2@9592,7878 ; C12.2@9579.72,7878.94 9593.5,7865.16 v1(9593.5,7839.57) ; C12.2@9588.45,7878.94 9595,7872.39 v1@9595,7839.57
  Top Layer w30: D5.A 9241.38,7009.09 9329.72,7097.44 9329.72,7486.22 9386.19,7542.69 v1(9461.09,7542.69)
  Bottom Layer w20: v1(9461.09,7542.69) 9461.09,7544.81 9459.65,7546.26 9537.4,7546.26 9593.5,7602.36 v1(9593.5,7839.57)
NetC14_2: C14.2 IC3.5 R15.2 R17.1 R20.1 | length 932
  Top Layer w15: IC3.5 10080,7748.74 10088.58,7740.16 10167.32,7740.16 10197.83,7770.67 10197.83,7970.47 10184.29,7984.02 R17.1
  Top Layer w30: R20.1 R15.2 9855,8039.2 9869.93,8054.13 10000,8054.13 10123.74,8054.13 C14.2 ; R17.1 10130.51,8028.15 10135.83,8033.46
NetC17_1: C17.1 D6.A IC1.5 IC2.1 | length 1472.6
  Top Layer w20: IC1.5 9245.16,7729.33 9417.32,7729.33 v1(9422.24,7734.25) ; D6.A 9265.47,6914.09 9423.29,7071.91 C17.1@9423.29,7338.29 ; C17.1@9420.63,7335.63 C17.1@9423.29,7338.29 ; v1(9423.23,7595.47) 9433.19,7585.51 9437.23,7585.51 9439.41,7587.69 9479.73,7587.69 9484.47,7582.95 9502.89,7582.95 9507.63,7587.69 9542.82,7587.69 IC2.1 9545,7526.3 9514.76,7496.06 9400.59,7496.06 9372.05,7467.52 9372.05,7361.22 9393.27,7340 C17.1 C17.1@9423.29,7338.29
  Bottom Layer w20: v1(9422.24,7734.25) 9422.24,7599.41 9423.23,7598.43 v1(9423.23,7595.47)
NetC17_2: C17.2 IC2.2 R25.2 | length 272.8
  Top Layer w20: R25.2 9505,7433.15 9595,7523.15 IC2.2
  Top Layer w30: C17.2 R25.2
NetC20_1: C20.1 IC1.3 R24.2 R29.2 R31.1 | length 620.9
  Top Layer w20: R29.2 8955.59,7239.02 R31.1 ; C20.1 R31.1 ; IC1.3 9150,7522.8 R24.2 9037.13,7432.8 9006.89,7402.56 9006.89,7246.06 9013.94,7239.02 R31.1
NetC21_1: C21.1 R25.1 R28.2 | length 631.1
  Top Layer w15: C21.1 9473.03,7150 9450.79,7172.24 9450.79,7273.62 9505,7327.83 R25.1 9505,7359.33 9529.53,7383.86 9800.2,7383.86 9823.82,7360.24 R28.2
NetC22_2: C22.2 R26.1 | length 100
  Top Layer w30: C22.2 R26.1
NetC23_1: C23.1 IC3.2 R32.1 R35.2 | length 822.1
  Top Layer w15: R32.1 9665,7113.54 9686.02,7092.52 9810.04,7092.52 9825,7107.48 C23.1 9825,7176.38 9842.52,7193.9 9952.34,7193.9 9985,7226.56 R35.2 R35.2@9980,7245
  Top Layer w20: R35.2@9980,7245 IC3.2
NetC23_2: C23.2 IC3.1 R27.1 R33.2 R34.2 | length 650.6
  Top Layer w15: R27.1 9665,7317.28 9742.28,7240 R33.2 ; R34.2 9930,7265
  Top Layer w20: 9930,7265 IC3.1
  Top Layer w30: R33.2 C23.2 R34.2
NetC49_1: C49.1 C50.1 L1.1 L2.6 R2.3 R45.1 | length 4258
  Top Layer w30: R2.3 10074.33,4054.61 10100.12,4028.82 v1(10100.12,3896.65) R45.1
  Top Layer w200: 9995.08,2654.53 10297.24,2352.36 11187.99,2352.36 11280.51,2444.88 11280.51,3047.83 L2.6@11252.56,3075.79
  Bottom Layer w30: 9995.08,2846.46 10491.14,2846.46 10543.31,2898.62 10543.31,3782.48 10434.06,3891.73 10105.04,3891.73 v1(10100.12,3896.65)
NetC74_1: C74.1 IC12.1 R97.2 R98.1 | length 544.3
  Top Layer w15: C74.1 10762.99,7373.23 10774.98,7385.22 10800.49,7385.22 R97.2
  Top Layer w50: R97.2@10842.99,7436.02 10842.99,7602.99 IC12.1 ; v1(11002.95,7435.04) v1(11002.95,7435.04) R98.1
  Bottom Layer w50: v1(10841.54,7436.02) 10840.55,7437.01 10836.61,7437.01 10838.58,7435.04 v1(11002.95,7435.04)
NetC103_2: C103.2 IC23.1 R141.2 R142.2 | length 404.3
  Top Layer w30: C103.2 R141.2 R142.2
  Top Layer w50: R141.2 10857.99,6872.44 IC23.1
NetC105_2: C105.2 IC13.1 R99.2 R100.2 | length 989.6
  Top Layer w15: C105.2 11158.74,6990.43 11187.5,7019.19 11187.5,7313.21 R99.2 11162.99,7363.78 11179.43,7380.22 11230.61,7380.22 11247.99,7397.6 R100.2
  Top Layer w20: R100.2 11247.99,7473.05 11294.29,7519.35 11294.29,7788.39 IC13.1
NetCON2B_1: CON2B.1 D3.2 | length 153.8
  Top Layer w50: CON2B.1 8822.83,2463.43 D3.2
NetCON2B_2: CON2B.2 D3.3 | length 153.8
  Top Layer w50: CON2B.2 8622.83,2463.43 D3.3
NetCON2C_1: CON2C.1 D4.2 | length 153.9
  Top Layer w50: D4.2 9270.67,2463.66 CON2C.1
NetCON2C_2: CON2C.2 D4.3 | length 153.9
  Top Layer w50: D4.3 9070.67,2463.66 CON2C.2
NetD2_1: D2.A K6.8 T1.2 T2.2 | length 1179.8
  Top Layer w20: D2.A 9261.34,8799.41 9261.34,9114.69 9300.2,9153.54 9430.12,9153.54 9456.69,9126.97 9456.69,9058.03 ; T1.2 9410.32,9038.27 9428.11,9056.06 9493.88,9056.06 9494.82,9055.12 9527.56,9055.12 9550.32,9032.36 T2.2
  Top Layer w30: K6.8 9268.98,8580 9313.03,8624.05 D2.A
NetD5_2: D5.K D6.K R38.2 | length 197.4
  Top Layer w20: R38.2 8995.91,6914.09 D6.K D5.K
NetD10_2: D10.1 D12.2 IC4.2 L2.5
NetIC1_1: IC1.1 T7.1 | length 441.8
  Top Layer w20: T7.1 8872.4,7248.19 8976.38,7352.16 8976.38,7551.18 9010.71,7585.51 IC1.1
NetIC1_2: IC1.2 R22.1 T7.2 | length 637.8
  Top Layer w18: T7.2 8946.38,7389.06 8946.38,7569.41 9025.79,7648.82 9095.28,7648.82 9100,7644.09 IC1.2
NetIC1_7: IC1.7 R18.2 | length 145
  Top Layer w15: R18.2 9100,7870 IC1.7
NetIC2_3: IC2.3 R26.2 R27.2 | length 215.5
  Top Layer w20: R27.2@9645,7450 IC2.3
  Top Layer w30: R26.2 R27.2
NetIC2_5: IC2.5 R20.2 | length 129.5
  Top Layer w20: IC2.5 9695,7805 R20.2
NetIC3_6: IC3.6 IC3.7 R36.1 R37.1 | length 898.7
  Top Layer w20: IC3.7 IC3.6 10030,7829.21 10038.58,7837.8 10138.58,7837.8 10147.64,7828.74 v1(10147.64,7784.45) ; R37.1@10133.09,7238.9 R37.1@10142.92,7238.9 ; R37.1@10147.15,7243.13 10143.98,7246.3 10143.98,7630.07 v1(10147.15,7633.25)
  Top Layer w30: R36.1 R37.1@10133.09,7238.9
  Bottom Layer w15: v1@10147.64,7632.76 v1(10147.15,7633.25) v1@10147.64,7633.74
  Bottom Layer w20: v1@10147.64,7633.74 v1(10147.64,7784.45)
NetIC4_4: IC4.4 R40.2 R43.2 T7.3 | length 4606.8
  Top Layer w30: R43.2 10038.27,4164.06 R40.2 10130.24,4476.69 10213.3,4559.76 IC4.4@10234.92,4559.76
  Top Layer w40: v1(8687.01,6383.86) 8687.01,5703.74 8823.82,5566.93 10069.88,5566.93 10107.28,5529.53 10107.28,4687.4 10234.92,4559.76 IC4.4 ; v1(8687.01,6641.73) 8687.01,6653.54 8670.28,6670.28 8670.28,6985 T7.3
  Bottom Layer w40: v1(8687.01,6383.86) 8682.09,6378.94 8680.12,6378.94 8687.01,6385.83 v1(8687.01,6641.73)
NetK6_4: K6.4 R6.2 R7.1 R8.1 | length 1768.3
  Top Layer w30: v1(9363.19,8368.11) 9363.19,8129.92 9408.11,8085 R7.1 R8.1
  Top Layer w40: R6.2 v1@9091.89,8415
  Top Layer w50: 8855.84,8427.62 8740.16,8543.31 8740.16,8672.24 8816.93,8749.02 9078.54,8749.02 9150,8820.47 K6.4
  Bottom Layer w30: v1(9102.36,8404.53) 9102.36,8387.8 9132.66,8357.5 9352.58,8357.5 v1(9363.19,8368.11)
NetR1_1: R1.1 R2.1 R2.2 R45.2 | length 510.7
  Top Layer w30: R1.1 9885.24,4017.64 R2.2 9938.27,3964.61 R2.1 10010.12,3936.46 R45.2
NetR1_2: R1.2 R40.1 | length 65
  Top Layer w30: R1.2 R40.1
NetR3_1: R3.1 T2.3 | length 107.2
  Top Layer w30: T2.3 9619.72,9106.93 R3.1
NetR4_2: R4.2 T1.3 | length 287.1
  Top Layer w20: R4.2 9339.84,8920 9291.34,8968.5 9291.34,9069.88 9328.39,9106.93 T1.3
NetR5_1: R5.1 T1.1 T2.1 | length 262.1
  Top Layer w20: T1.1 9335.51,8994.21 9353.03,8976.69 9435.83,8976.69 9440,8976.69 ; R5.1 9440,8976.69 ; T2.1 9475.51,8983.03 9469.17,8976.69 9440,8976.69
NetR7_2: R7.2 R8.2 R10.1 | length 391.3
  Top Layer w15: R8.2 9520,8136.73 9524.23,8132.5 9714.75,8132.5 9715.12,8132.87 9741.14,8132.87 9760,8151.73 R10.1
  Top Layer w20: R7.2 R8.2
NetR10_2: R10.2 R15.1 | length 125
  Top Layer w20: R15.1 R10.2@9765,8080
NetR11_1: R11.1 T3.3 | length 194.8
  Top Layer w15: T3.3 8850,8150 R11.1
NetR12_1: R12.1 T3.1 T4.1 T4.2 | length 500.7
  Top Layer w15: T3.1 8812.6,8098.82 8842.52,8068.9 8927.17,8068.9 8973.27,8115 R12.1 ; T4.1 T4.2
  Top Layer w25: R12.1 9027.4,8142.4 T4.2
NetR13_1: R13.1 T5.3 | length 196.8
  Top Layer w15: T5.3 9130,8155 R13.1
NetR14_1: R14.1 T5.1 T6.1 T6.2 | length 491.7
  Top Layer w15: T5.1 9092.6,8109.17 9132.87,8068.9 9228.9,8068.9 R14.1 9307.4,8147.4 T6.2 T6.1
NetR18_1: R18.1 R19.1 R61.2 | length 187.7
  Top Layer w30: R18.1 R19.1 9284.72,7850.28 R61.2
NetR21_2: R21.2 R23.2 | length 237.9
  Top Layer w20: R21.2@8775,7670 8775,7434.37 R23.2
NetR22_2: R22.2 R23.1 | length 169.5
  Top Layer w10: R23.1 8807.36,7342.8
  Top Layer w15: 8807.36,7342.8 8825.79,7361.22 8825.79,7410.43 8848.15,7432.8 R22.2
NetR30_2: R30.2 R38.1 T8.1 | length 537.7
  Top Layer w15: R38.1 8995,7045.2 9029.53,7079.72 9169.29,7079.72 9202.76,7113.19 R30.2
  Top Layer w30: T8.1 8820,6945 8880,7005 R38.1
NetR32_2: R32.2 R33.1 | length 135.2
  Top Layer w15: R32.2 9676.18,7228.82 9676.18,7212.6 9691.28,7197.5 9711.95,7197.5 9745,7164.45 R33.1
NetR39_2: R39.2 T8.2 T9.1 | length 687.1
  Top Layer w30: 9020,6829.06 9020.94,6830
  Top Layer w50: T8.2 9273.19,6830 R39.2 ; T9.1 9020,6829.06
"OUTPUT VOLTAGE": "DC VOLTAGE.1" C6.1 D29.1 K6.1 K6.2 K6.6 T3.2 | length 6016.7
  Top Layer w15: 8690,8941.89 8678.15,8930.04 8678.15,8522.64 8887.4,8313.39 T3.2
  Top Layer w200: 8690,8941.89 8634.84,8997.05 8634.84,9435.04 8700.79,9500.98 9151.57,9500.98
  Bottom Layer w200: 9862.2,9405.51 9862.2,9057.09 10189.96,8729.33 11312.01,8729.33 11492.13,8549.21 11492.13,6671.26 11448.82,6627.95
"PREREGULATED DC GROUND": C1.2 C4.1 C7.2 C34.2 C41.2 C49.2 C50.2 D1.4 D10.3 D12.1 D29.3 IC4.3 IC4.5 R35.1 R36.2 R43.1 R48.1 | length 11234.2
  Top Layer w30: R35.1 R36.2@10061.89,7150 ; v1(10062.99,7110.24) R36.2 ; v1@10066.93,6844.49 10570.87,6844.49 10617.99,6797.37 D29.3
  Top Layer w40: D1.4@8954.72,4436.24 C4.1 C1.2 ; R43.1@10150.43,4142.56 10206.55,4198.68 IC4.5 IC4.3
  Top Layer w100: D1.4@8937.42,4436.43 D1.4@8954.92,4436.43 ; 9516.14,3317.52 C7.2@9583.66,3317.52
  Top Layer w200: 8775.59,4058.07 8775.59,4407.48 ; 8813.98,4020.67 9508.27,3326.38 C7.2 10316.54,3326.38 10338.58,3348.43 ; C49.2 10618.11,2681.89 ; 10433.07,3297.24 10618.11,3112.2 ; 10744.59,3956.2 10618.11,3829.72 10618.11,3112.2 ; 10823.82,8723.43 11310.04,8723.43 11492.13,8541.34 11492.13,4377.95 ; C50.2@10940.94,2681.89 10618.11,2681.89 ; 10618.11,2681.89 10618.11,3112.2
  Bottom Layer w30: v1(10062.99,7110.24) 10059.06,7106.3 10059.06,6977.21 10059.55,6976.72 10059.06,6976.23 10059.06,6856.3 v1(10068.9,6846.46)
"PREREGULATED DC VOLTAGE": C41.1 L1.2 R39.1 T9.3 | length 4407.3
  Top Layer w50: T9.3@9450.51,6720.51 R39.1
  Bottom Layer w150: 9976.38,3019.11 C41.1@10410.43,3019.11
  Bottom Layer w200: 9587.6,6635.83 9665.35,6635.83 9866.14,6435.04 9866.14,3641.73 9976.38,3531.5 9976.38,3065.94
"REGULATED DC VOLTAGE": C9.1 C14.1 C22.1 K6.3 K6.5 R6.1 R29.1 T5.2 T9.2 | length 6839
  Top Layer w18: T5.2 9167.4,8327.4 R6.1 ; C14.1 10129.92,8211.61 v1(10130.91,8212.6)
  Top Layer w30: R29.1 8954.72,7092.52 8937.01,7074.8 8844.49,7074.8 8732.28,6962.6 8732.28,6690.94 8820.63,6602.6 9235,6602.6 ; T9.2 9235,6602.6 ; C22.1 9585,6695.24 9492.36,6602.6 9235,6602.6
  Top Layer w40: R6.1 9269.13,8429.13 9544.29,8429.13 ; C9.1 9560,8374.02 9623.98,8310.04 v1@10020.67,8310.04
  Bottom Layer w15: K6.3 8850,9484.65
  Bottom Layer w18: v1(10031.5,8310.04) 10033.46,8310.04 v1(10130.91,8212.6)
  Bottom Layer w200: 8772.64,9519.68 9275.59,9519.68 9391.73,9403.54 9391.73,9140.75 ; 9287.24,7082.68 9287.24,8058.9 9560,8331.65 C9.1 9560,9005.94 9425.2,9140.75
RELAY: P1.8 R5.2 | length 1187.5
  Top Layer w15: R5.2 9500.71,8830 9730.32,8600.39 10317.91,8600.39 10357.26,8561.04 10357.26,8494.58 10310.24,8447.55 P1.8
UADC: C70.1 P1.4 R37.2 R119.2 | length 1547.1
  Top Layer w20: C70.1 10315,7465.59 10406.5,7557.09 10406.5,7921.47 10326.18,8001.78 10326.18,8227.76 10510.24,8411.81 P1.4
  Top Layer w30: R37.2 10245.47,7150 10315,7219.53 R119.2 C70.1@10315,7420
UNKNOW: P1.10 R61.1 | length 1357.2
  Top Layer w18: R61.1 v1(9476.38,7814.96) ; v1(9785.43,7806.1) 9810.04,7830.71 9810.04,8042.32 9860.24,8092.52 9935.04,8092.52 10210.24,8367.72 P1.10
  Bottom Layer w18: v1(9476.38,7814.96) 9476.38,7853.35 9507.87,7884.84 9752.95,7884.84 9785.43,7852.36 v1(9785.43,7806.1)
UREF: P1.3 R119.1 | length 1379.6
  Top Layer w20: R119.1 10360,7385 10360,7457.06 10438.27,7535.33 10438.27,7932.12 10356.18,8014.21 10356.18,8206.45 10402.68,8252.95 10416.34,8252.95 10559.76,8396.38 10559.76,8472.13 P1.3
USOLL: P1.7 R9.1 | length 910.2
  Top Layer w15: R9.1 9600,8199.41 9629.92,8229.33 10019.68,8229.33 10157.26,8366.91 10157.26,8438.76 10193.13,8474.63 10263.21,8474.63 P1.7
pads on no net: C1.0 C2.0 C3.0 C4.0 D2.0 D5.0 D6.0 D20.0 D21.0 IC13.4 L2.1 L2.3 R21.1 T1.0 T2.0 T3.0 T4.0 T5.0 T6.0 T7.0

## Polygon pours and split planes (outlines as drawn)
GND on Bottom Layer "Top Layer-No Net" (solid, remove dead copper, pour order 2): 8231.92,6492.13 11715.55,6492.13 11715.55,9689.75 11699.38,9706.59 11684.17,9722.44 8221.46,9722.44

## Keep-outs
Keep-Out Layer:
  lines w30: 8234.25,2054.13 11681.1,2054.13 11681.1,9722.44 8234.25,9722.44 8234.25,2054.13 ; 17401.89,2279.92 17401.89,5376.38 22099.72,5376.38 22099.72,2279.92 17401.89,2279.92

## Other copper
Top Layer:
  rectangle net GND: 10353.35,9092.52 10992.13,9589.57
  rectangle net "PREREGULATED DC GROUND": 10872.05,4221.46 11594.49,4448.82
  rectangle net "PREREGULATED DC GROUND": 10711.61,8619.09 10938.98,8849.41
  rectangle net "PREREGULATED DC GROUND": 11181.1,6497.05 11553.15,6706.69
  rectangle net "PREREGULATED DC GROUND": 10574.8,6481.3 11460.63,6589.57
  rectangle net "PREREGULATED DC GROUND": 10574.8,6496.06 10703.74,6719.49
  rectangle net "OUTPUT VOLTAGE": 9107.28,9220.47 10229.33,9593.5
  rectangle net "OUTPUT VOLTAGE": 8680.12,8813.98 8909.45,9142.72
  rectangle net NetC3_2: 9509.84,4332.68 9838.58,4548.23
  rectangle net "PREREGULATED DC GROUND": 8671.26,4322.83 9017.72,4540.35
  rectangle net NetC3_2: 9499.02,3625.98 9827.76,3892.72
  rectangle net "PREREGULATED DC GROUND": 10208.66,3169.29 10557.09,3542.32
  region net NetC49_1: 10112.2,2549.21 10112.2,2877.95 9885.83,2877.95 9885.83,2549.21
  region net NetC3_2: 10597.44,4230.31 10597.44,4472.44 10419.29,4472.44 10419.29,4230.31
  region net "PREREGULATED DC GROUND": 10924.21,4141.73 10562.01,4141.73 10562.01,3922.24 10924.21,3922.24
  region net "PREREGULATED DC GROUND": 10771.65,4545.28 10771.65,3916.34 10949.8,3916.34 10949.8,4545.28
Bottom Layer:
  rectangle net GND: 8266.73,3182.09 8630.91,6605.31
  rectangle net NetD10_2: 11043.31,3585.63 11418.31,3821.85
  rectangle net NetD10_2: 10562.99,4200.79 11226.38,4414.37
  rectangle net NetD10_2: 10562.99,4210.63 10758.86,4645.67
  rectangle net NetD10_2: 10363.19,4483.27 10727.36,4644.69
  rectangle net NetD10_2: 11043.31,3621.06 11278.54,4556.1
  rectangle net "REGULATED DC VOLTAGE": 9143.7,6853.35 9440.94,7082.68
  rectangle net "REGULATED DC VOLTAGE": 9072.83,8996.06 9505.91,9165.35
  rectangle net "REGULATED DC VOLTAGE": 8656.5,9201.77 8936.02,9620.08
  rectangle net NetC2_2: 9071.85,4256.89 9206.69,4518.7
  rectangle net NetC1_1: 9287.4,4217.52 9422.24,4508.86
  rectangle net NetC2_2: 9350.39,2312.99 9589.57,2574.8
  rectangle net NetC1_1: 9670.28,2313.98 9907.48,2642.72
  rectangle net "PREREGULATED DC GROUND": 10075.79,3967.52 10731.3,4158.46
  rectangle net "PREREGULATED DC GROUND": 10070.87,3967.52 10250.98,4510.83
  rectangle net "PREREGULATED DC VOLTAGE": 9378.94,6490.16 9742.13,6796.26
  rectangle net "REGULATED DC VOLTAGE": 9144.69,6616.14 9315.94,7086.61
  rectangle net "OUTPUT VOLTAGE": 10374.8,6496.06 10503.74,6719.49
  rectangle net "OUTPUT VOLTAGE": 10381.89,6484.25 11548.23,6592.52
  rectangle net "OUTPUT VOLTAGE": 11179.13,6499.02 11551.18,6708.66

## Text inside footprints (layer, text, board x,y; h text height)
D1: Bottom Overlay "-" at 8979.83,4492.56 h56.25; Bottom Overlay "+" at 9579.83,4491.56 h56.25; Bottom Overlay "~" at 9178.83,4463.56 h56.25; Bottom Overlay "~" at 9381.83,4463.56 h56.25